# Altium PCB Nixie Valve Clock Rotary Encoder Daughterboard.PcbDoc
Units mm, origin at the board's own origin, x right, y up, seen from the top; angles counter-clockwise.
Board outline 16 x 41.76 mm, 2 copper layers (Top Layer, Bottom Layer), stack 1.57 mm thick; 2 components, 6 nets, 17 pads, 0 vias.
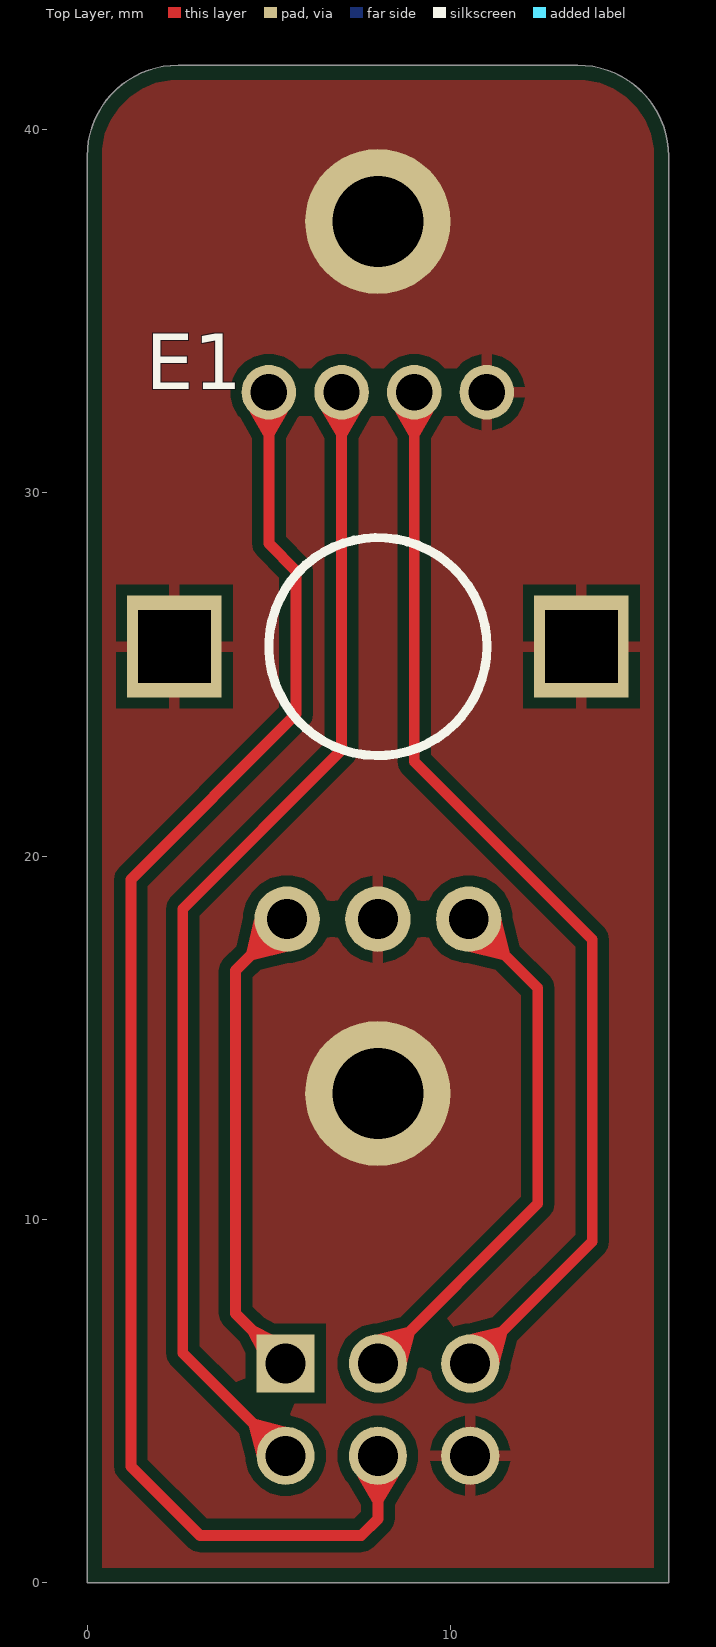
[diagram p0: Top Layer view]
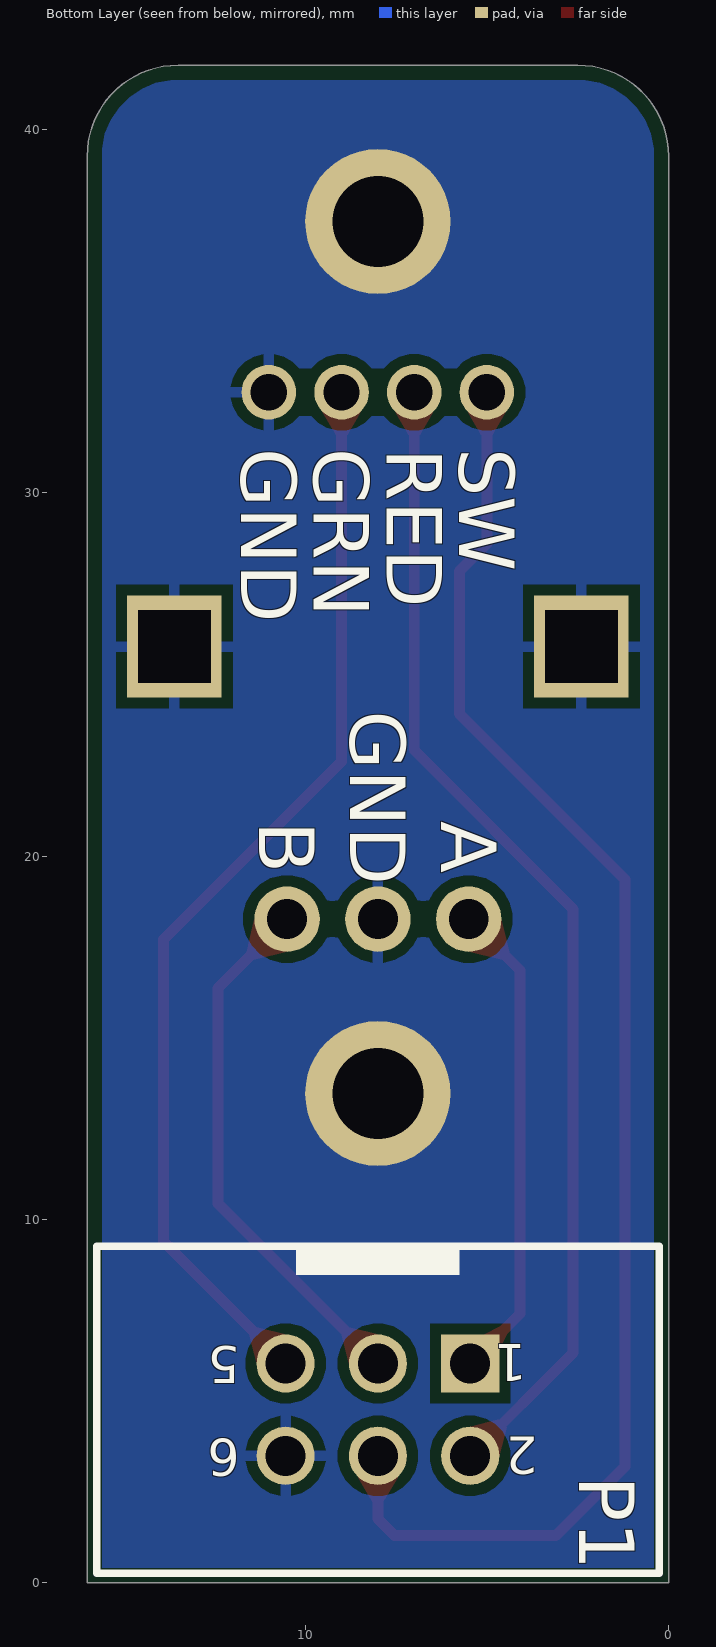
[diagram p1: Bottom Layer view, seen from below]

## Layer stack, top to bottom
Top Solder: solder mask 0.01, SM-001, Dk 4
Top Layer: signal copper 0.035
Dielectric 1: core 1.5, Core-043, Dk 4.3
Bottom Layer: signal copper 0.035
Bottom Solder: solder mask 0.01, SM-001, Dk 4

## Board outline
0,0 16,0 16,39.265 ccw(c13.5,39.265) 13.5,41.765 2.5,41.765 ccw(c2.5,39.265) 0,39.265

## Design rules (kind name [scope] priority, off if disabled: settings)
BoardOutlineClearance [All] p1: gap=0.4 ignorepadtopadclearanceinfootprint=FALSE
Clearance Clearance_GND_Planes [InPoly AND InNet('GND')] p1: gap=0.3 ignorepadtopadclearanceinfootprint=FALSE
Clearance Clearance_NPTH_to_Track [IsThruPin AND NOT(PadIsPlated) vs IsTrack] p2: gap=0.2 ignorepadtopadclearanceinfootprint=FALSE
Clearance Clearance_PTH_to_Track [IsTrack vs IsThruPin AND PadIsPlated] p3: gap=0.28 ignorepadtopadclearanceinfootprint=FALSE
Clearance Clearance_Via_to_Track [IsVia vs IsTrack] p4: gap=0.2 ignorepadtopadclearanceinfootprint=FALSE
Clearance Clearance_SMD_Pad_to_SMD_Pad [IsPad AND NOT(IsThruPin) vs IsPad AND NOT(IsThruPin)] p5: gap=0.15 ignorepadtopadclearanceinfootprint=FALSE
Clearance Clearance_Pad_to_Track [IsPad vs IsTrack] p6: gap=0.1 ignorepadtopadclearanceinfootprint=FALSE
Clearance Clearance_Inner_Cu_to_PTH [OnLayer('Inner 1') OR OnLayer('Inner 2') vs IsThruPin AND PadIsPlated] p7: gap=0.1 ignorepadtopadclearanceinfootprint=FALSE
Clearance Clearance_Inner_Cu_to_Vias [IsVia vs OnLayer('Inner 1') OR OnLayer('Inner 2')] p8: gap=1.95 ignorepadtopadclearanceinfootprint=FALSE
Clearance Clearance_Same_Nets [IsTrack vs IsTrack] p9: gap=0.25 ignorepadtopadclearanceinfootprint=FALSE
Clearance Minimum_Clearance [All] p10: gap=0.1 ignorepadtopadclearanceinfootprint=FALSE
Clearance [All] p11: gap=0.3 ignorepadtopadclearanceinfootprint=FALSE
HoleSize "Minimum Hole Size PTH" [(IsThruPin AND IsPad And PadIsPlated)] p1: absolutevalues=TRUE maxlimit=5 minlimit=0.3 maxpercent=80.000 minpercent=20.000
HoleSize "Minimum Hole Size VIA" [IsVia] p2: absolutevalues=TRUE maxlimit=5 minlimit=0.15 maxpercent=80.000 minpercent=20.000
HoleSize "Minimum Hole Size NPTH" [(IsThruPin AND IsPad And (NOT PadIsPlated))] p3: absolutevalues=TRUE maxlimit=5 minlimit=0.5 maxpercent=80.000 minpercent=20.000
HoleSize [All] p4: absolutevalues=TRUE maxlimit=7.62 minlimit=0.254 maxpercent=80.000 minpercent=20.000
HoleToHoleClearance ViaHoleToHoleClearance [IsVia vs IsVia] p1: gap=0.2 allowstackedmicrovias=TRUE
HoleToHoleClearance PadHoleToHoleClearance [IsPad vs IsPad] p2: gap=0.45 allowstackedmicrovias=TRUE
HoleToHoleClearance [All] p3: gap=0.254 allowstackedmicrovias=TRUE
MinimumAnnularRing PTH_MinimumAnnularRing [(IsThruPin AND IsPad And PadIsPlated)] p1: minimumring=0.2
MinimumAnnularRing VIA_MinimumAnnularRing [IsVia] p2: minimumring=0.05
MinimumAnnularRing NPTH_MinimumAnnularRing [(IsThruPin AND IsPad And (NOT PadIsPlated))] p3: minimumring=0.45
MinimumAnnularRing [All] p4: minimumring=0.2
MinimumSolderMaskSliver [All] p1: minsoldermaskwidth=0.1
PolygonConnect PolygonConnect_GND_Vias_And_Pads [(IsVia AND InNet('GND')) OR (IsPad AND IsThruPin AND NOT(InAnyComponent) AND InNet('GND')) vs IsPoly AND InNet('GND')] p1: connectstyle=Direct reliefconductorwidth=0.3 reliefentries=4 polygonreliefangle="90 Angle" airgapwidth=0.3
PolygonConnect [All] p2: connectstyle=Relief reliefconductorwidth=0.3 reliefentries=4 polygonreliefangle="90 Angle" airgapwidth=0.3
RoutingVias [All] p1: holewidth=0.711 width=1.27 viastyle="Through Hole" minholewidth=0.711 minwidth=1.27 maxholewidth=0.711 maxwidth=1.27
SMDNeckDown [All] p1: percent=100.000
SilkToSilkClearance [All] p1: silktosilkclearance=0.1
SilkToSolderMaskClearance [All] p1: minsilkscreentomaskgap=0 clearancetoexposedcopper=FALSE
SilkToSolderMaskClearance SilkscreenOverComponentPads [IsPad] p2: minsilkscreentomaskgap=0.254 clearancetoexposedcopper=TRUE
SolderMaskExpansion SolderMaskExpansion_Tented_Vias [IsVia] p1: expansion=0.1 istentingtop=TRUE
SolderMaskExpansion [All] p2: expansion=0.1 istentingtop=FALSE
SupplyNets "Schematic Supply Nets_2" [InNet('+3V3')] p1: voltage=0.000
SupplyNets "Schematic Supply Nets_4" [InNet('GND')] p2: voltage=0.000
SupplyNets "Schematic Supply Nets_3" [InNet('+9V')] p3: voltage=0.000
SupplyNets "Schematic Supply Nets_1" [InNet('+HV')] p4: voltage=0.000
SupplyNets "Schematic Supply Nets" [InNet('+100V')] p5: voltage=0.000
Width "Minimum Width" [All] p1: maxlimit=3 minlimit=0.1 preferedwidth=0.3
25 further rules are at their usual default settings.

## Components (designator, comment, footprint, x,y, rotation, side; value= is the part's Value field where it differs from the comment)
E1 "4-1879314-5" 4-1879314-5-Footprint-1 8,18.265 r0 top value=25kΩ
P1 "61200621621" 61200621621 8,4.765 r0 bottom

## Footprints (in the part's own frame and the unit in brackets; to place one, negate y for a bottom-side part, rotate by r counter-clockwise, add the part's x,y. Pads: shape width x height; smd on the part's side, far side on the other; paste and mask are expansions set on the pad)
4-1879314-5-Footprint-1 [mm]
  round 1.5 hole 1: 1(3,14.5) 2(1,14.5) 3(-1,14.5) 4(-3,14.5)
  round 1.8 hole 1.1: A(-2.5,0) B(2.5,0) C(0,0)
  rect 2.6x2.8 hole 2 square: MP0(-5.6,7.5) MP1(5.6,7.5)
  silkscreen extent -3,4.5 3,10.5, body extent -7,-0.15 7,14.65, height 25
61200621621 [mm] "6 pins, straight, gold plating"
  rect 1.6x1.6 hole 1.1: 1(-2.54,-1.27)
  round 1.6 hole 1.1: 2(-2.54,1.27) 3(0,-1.27) 4(0,1.27) 5(2.54,-1.27) 6(2.54,1.27)
  silkscreen extent -7.74,-4.5 7.74,4.5, body extent -7.64,-4.43 7.64,4.75, height 9.13

## Part data
E1: library part CMP-010-00025-2, "Incremental Encoder, Mechanical, 24Ppr Rohs Compliant: Yes", Color="Green, Red", Max Operating Temperature=85°C, Max Supply Voltage=5V, Min Operating Temperature=-40°C, Built in Switch=Yes, China RoHS=Compliant, ELV=Compliant, Hole Diameter=1.1mm, Lifecycle Status=Production, Mounting Technology="Surface Mount", Number of Channels=2, Pins=7, Pulses per Revolution=24, REACH SVHC=Yes, RoHS=Compliant, RoHS Compliant=Yes, Termination="Through Hole"
P1: library part CMP-002-00109-1, "Board Connector, 6 Contact(s), 2 Row(s), Male, Straight, Solder Terminal", Flammability Rating="UL94 V-0", Connector Type="BOARD CONNECTOR", Contact Finish - Mating=GOLD, Contact Finish - Termination="Gold (Au) - with Nickel (Ni) barrier", Contact Gender=Male, Contact Material="Copper Alloy", DIN Conformance=No, Filter Feature=No, IEC Conformance=No, JESD-609 Code=e4, MIL Conformance=No, Mixed Contacts=No, Mounting Style=STRAIGHT, Mounting Technology=Board, Number of Contacts=6, Number of Rows Loaded=2, Option="General Purpose", Reach SVHC Compliant=Yes, RoHS Compliant=Yes, Terminal Pitch=2.54mm, Termination=Solder

## Free pads (board coordinates)
  round 4 hole 2.5: 1(8,37.465) 2(8,13.465)

## Nets (pads, with @x,y where several pads share a name; then routed paths per layer and width w, separated by ;. In a path a pad name is that pad's centre, name@x,y a point inside that pad or via, vN(x,y) a via of type N, cw(c..) or ccw(c..) an arc to the next point about the centre after c; other vN are vias at no path point)
ENC_GRN_LED: E1.2 P1.5 | length 30.2
  Top Layer w0.3: E1.2 9,22.6 13.9,17.7 13.9,9.395 P1.5
ENC_RED_LED: E1.3 P1.2 | length 32.3
  Top Layer w0.3: P1.2 2.629,6.326 2.629,18.544 7,22.916 E1.3
ENC_SW: E1.4 P1.4 | length 41.3
  Top Layer w0.3: E1.4 5,28.6 5.75,27.85 5.75,23.906 1.2,19.356 1.2,3.2 3.1,1.3 7.542,1.3 8,1.758 P1.4
ENCDR_A: E1.A P1.1 | length 13.4
  Top Layer w0.3: P1.1 4.084,7.41 4.084,16.849 E1.A
ENCDR_B: E1.B P1.3 | length 14.8
  Top Layer w0.3: P1.3 12.4,10.435 12.4,16.365 E1.B
GND: E1.1 E1.C E1.MP0 E1.MP1 P1.6 pad.1 pad.2

## Polygon pours and split planes (outlines as drawn)
GND on Top Layer "TOP_GND" (solid, remove dead copper, pour order 0): 0,0 16,0 16,39.265 ccw(c13.5,39.265) 13.5,41.765 2.5,41.765 ccw(c2.5,39.265) 0,39.265
GND on Bottom Layer "GND_BOTTOM" (solid, remove dead copper, pour order 1): 0,0 16,0 16,39.265 ccw(c13.5,39.265) 13.5,41.765 2.5,41.765 ccw(c2.5,39.265) 0,39.265

## Silkscreen, mask and mechanical layers (free items; w line width, h text height)
Bottom Overlay:
  text "SW" at 5.762,31.217 h1.52 r90
  text "RED" at 7.762,31.217 h1.52 r90
  text "GRN" at 9.762,31.217 h1.52 r90
  text "GND" at 11.762,31.217 h1.52 r90
  text "GND" at 8.762,24.001 h1.52 r90
  text "A" at 6.262,20.954 h1.52 r90
  text "B" at 11.262,20.954 h1.52 r90
Mechanical 1:
  lines w0.254: 0,0 0,39.265 cw(c2.5,39.265) 2.5,41.765 13.5,41.765 cw(c13.5,39.265) 16,39.265 16,0 0,0
  lines w0.381: 19.216,-9.792 29.628,-9.792 63.4,-9.792 80.16,-9.792 96.666,-9.792 111.14,-9.792 ; 19.216,-6.744 29.628,-6.744 63.4,-6.744 80.16,-6.744 96.666,-6.744 111.14,-6.744 ; 19.216,-3.696 29.628,-3.696 63.4,-3.696 80.16,-3.696 96.666,-3.696 111.14,-3.696 ; 19.216,-0.648 29.628,-0.648 63.4,-0.648 80.16,-0.648 96.666,-0.648 111.14,-0.648 ; 19.216,2.4 29.628,2.4 63.4,2.4 80.16,2.4 96.666,2.4 111.14,2.4 ; 19.216,5.448 29.628,5.448 63.4,5.448 80.16,5.448 96.666,5.448 111.14,5.448 ; 19.216,8.496 29.628,8.496 63.4,8.496 80.16,8.496 96.666,8.496 111.14,8.496 ; 19.216,11.544 29.628,11.544 63.4,11.544 80.16,11.544 96.666,11.544 111.14,11.544 ; 19.216,14.592 111.14,14.592 ; 29.628,17.64 29.628,-12.84 ; 63.4,17.64 63.4,-12.84 ; 80.16,17.64 80.16,-12.84 ; 96.666,17.64 96.666,-12.84 ; 29.628,-12.84 19.216,-12.84 19.216,17.64 111.14,17.64 111.14,-12.84 96.666,-12.84 ; 29.628,-12.84 63.4,-12.84 ; 63.4,-12.84 80.16,-12.84 ; 80.16,-12.84 96.666,-12.84
  text "Layer" at 20.994,15.354 h1.52
  text "Name" at 31.406,15.354 h1.52
  text "Material" at 65.178,15.354 h1.52
  text "Thickness" at 81.938,15.354 h1.52
  text "Constant" at 98.444,15.354 h1.52
  text "Use 2x M2 (2.1mm ID x 4mm OD) 6mm length spacer between this  / daughterboard and motherboard, and 2x M2 Cap Head 12mm screws /  / 07/12/2025: CHANGE: Use 2x M2 (2.1mm ID x 4mm OD) 10mm length spacer, since TE Connectivity's 3d model of the rotary encoder was wrong :) Also DNF P1 and solder wires from this daugterboard to the motherboard (wires terminated with M20 or similar crimps and crimp housings" at 19.216,15.03 h1.52
  text "Top Overlay" at 31.406,12.306 h1.52
  text "Top Solder" at 31.406,9.258 h1.52
  text "SM-001" at 65.178,9.258 h1.52
  text "0.010mm" at 81.938,9.258 h1.52
  text "4" at 98.444,9.258 h1.52
  text "Top Surface Finish" at 31.406,6.21 h1.52
  text "Lead-Free" at 65.178,6.21 h1.52
  text "0.020mm" at 81.938,6.21 h1.52
  text "1" at 20.994,3.162 h1.52
  text "Top Layer" at 31.406,3.162 h1.52
  text "CF-004" at 65.178,3.162 h1.52
  text "0.035mm" at 81.938,3.162 h1.52
  text "Dielectric 1" at 31.406,0.114 h1.52
  text "Core-043" at 65.178,0.114 h1.52
  text "1.500mm" at 81.938,0.114 h1.52
  text "4.3" at 98.444,0.114 h1.52
  text "2" at 20.994,-2.934 h1.52
  text "Bottom Layer" at 31.406,-2.934 h1.52
  text "CF-004" at 65.178,-2.934 h1.52
  text "0.035mm" at 81.938,-2.934 h1.52
  text "Bottom Surface Finish" at 31.406,-5.982 h1.52
  text "Lead-Free" at 65.178,-5.982 h1.52
  text "0.020mm" at 81.938,-5.982 h1.52
  text "Bottom Solder" at 31.406,-9.03 h1.52
  text "SM-001" at 65.178,-9.03 h1.52
  text "0.010mm" at 81.938,-9.03 h1.52
  text "4" at 98.444,-9.03 h1.52
  text "Bottom Overlay" at 31.406,-12.078 h1.52
Drill Drawing:
  circle w0.254: c2.856,68.772 r0.847
  lines w0.254: 2.009,56.495 3.703,56.495 3.703,58.188 2.009,58.188 2.009,56.495 ; 2.009,60.305 2.856,60.728 3.703,60.305 3.279,61.152 3.703,61.998 2.856,61.575 2.009,61.998 2.433,61.152 2.009,60.305 ; 2.009,64.538 2.433,64.538 2.856,64.115 3.279,64.538 3.703,64.538 3.279,64.962 3.703,65.385 3.279,65.385 2.856,65.808 2.433,65.385 2.009,65.385 2.433,64.962 2.009,64.538
  lines w0.381: 0.49,55.352 187.18,55.352 ; 0.49,70.592 187.18,70.592 ; 14.483,51.542 14.483,74.402 ; 27.941,51.542 27.941,74.402 ; 55.873,51.542 55.873,74.402 ; 68.722,51.542 68.722,74.402 ; 87.361,51.542 87.361,74.402 ; 125.45,51.542 125.45,74.402 ; 140.432,51.542 140.432,74.402 ; 159.375,51.542 159.375,74.402 ; 0.49,51.542 187.18,51.542 187.18,74.402 0.49,74.402 0.49,51.542
  text "Symbol" at 2.776,71.735 h1.83
  text "Count" at 15.626,71.735 h1.83
  text "Hole Size" at 29.084,71.735 h1.83
  text "Plated" at 57.016,71.735 h1.83
  text "Hole Type" at 69.865,71.735 h1.83
  text "Drill Layer Pair" at 88.504,71.735 h1.83
  text "Via/Pad" at 126.593,71.735 h1.83
  text "Pad Shape" at 141.575,71.735 h1.83
  text "Template" at 160.518,71.735 h1.83
  text "2" at 15.626,67.925 h1.52
  text "2.000mm (78.74mil)" at 29.084,67.925 h1.52
  text "PTH" at 57.016,67.925 h1.52
  text "Rectangle" at 69.865,67.925 h1.52
  text "Top Layer - Bottom Layer" at 88.504,67.925 h1.52
  text "Pad" at 126.593,67.925 h1.52
  text "Rectangle" at 141.575,67.925 h1.52
  text "r280_260h200_220" at 160.518,67.925 h1.52
  text "2" at 15.626,64.115 h1.52
  text "2.500mm (98.43mil)" at 29.084,64.115 h1.52
  text "PTH" at 57.016,64.115 h1.52
  text "Round" at 69.865,64.115 h1.52
  text "Top Layer - Bottom Layer" at 88.504,64.115 h1.52
  text "Pad" at 126.593,64.115 h1.52
  text "Rounded" at 141.575,64.115 h1.52
  text "c400h250" at 160.518,64.115 h1.52
  text "4" at 15.626,60.305 h1.52
  text "1.000mm (39.37mil)" at 29.084,60.305 h1.52
  text "PTH" at 57.016,60.305 h1.52
  text "Round" at 69.865,60.305 h1.52
  text "Top Layer - Bottom Layer" at 88.504,60.305 h1.52
  text "Pad" at 126.593,60.305 h1.52
  text "Rounded" at 141.575,60.305 h1.52
  text "c150h100" at 160.518,60.305 h1.52
  text "9" at 15.626,56.495 h1.52
  text "1.100mm (43.31mil)" at 29.084,56.495 h1.52
  text "PTH" at 57.016,56.495 h1.52
  text "Round" at 69.865,56.495 h1.52
  text "Top Layer - Bottom Layer" at 88.504,56.495 h1.52
  text "Pad" at 126.593,56.495 h1.52
  text "(Mixed)" at 141.575,56.495 h1.52
  text "(Mixed)" at 160.518,56.495 h1.52
  text "17 Total" at 15.626,52.685 h1.52
  text "Slot definitions :" at 2.776,49.003 h1.52
  text "Routed Path Length" at 29.007,49.003 h1.52
  text "= Calculated from tool start centre position to tool end centre position." at 57.015,49.003 h1.52
  text "Hole Length" at 29.007,46.463 h1.52
  text "= Routed Path Length + Tool Size = Slot length as defined in the PCB layout" at 46.604,46.463 h1.52

## Text inside footprints (layer, text, board x,y; h text height)
P1: Bottom Overlay "5" at 11.8,6.505 h1.02 r180; Bottom Overlay "2" at 3.6,4.025 h1.02 r180; Bottom Overlay "6" at 11.8,3.965 h1.02 r180; Bottom Overlay "1" at 3.9,6.565 h1.02 r180